# EAGLE board NIRGM V7 Double (EAGLE 8.5.1)
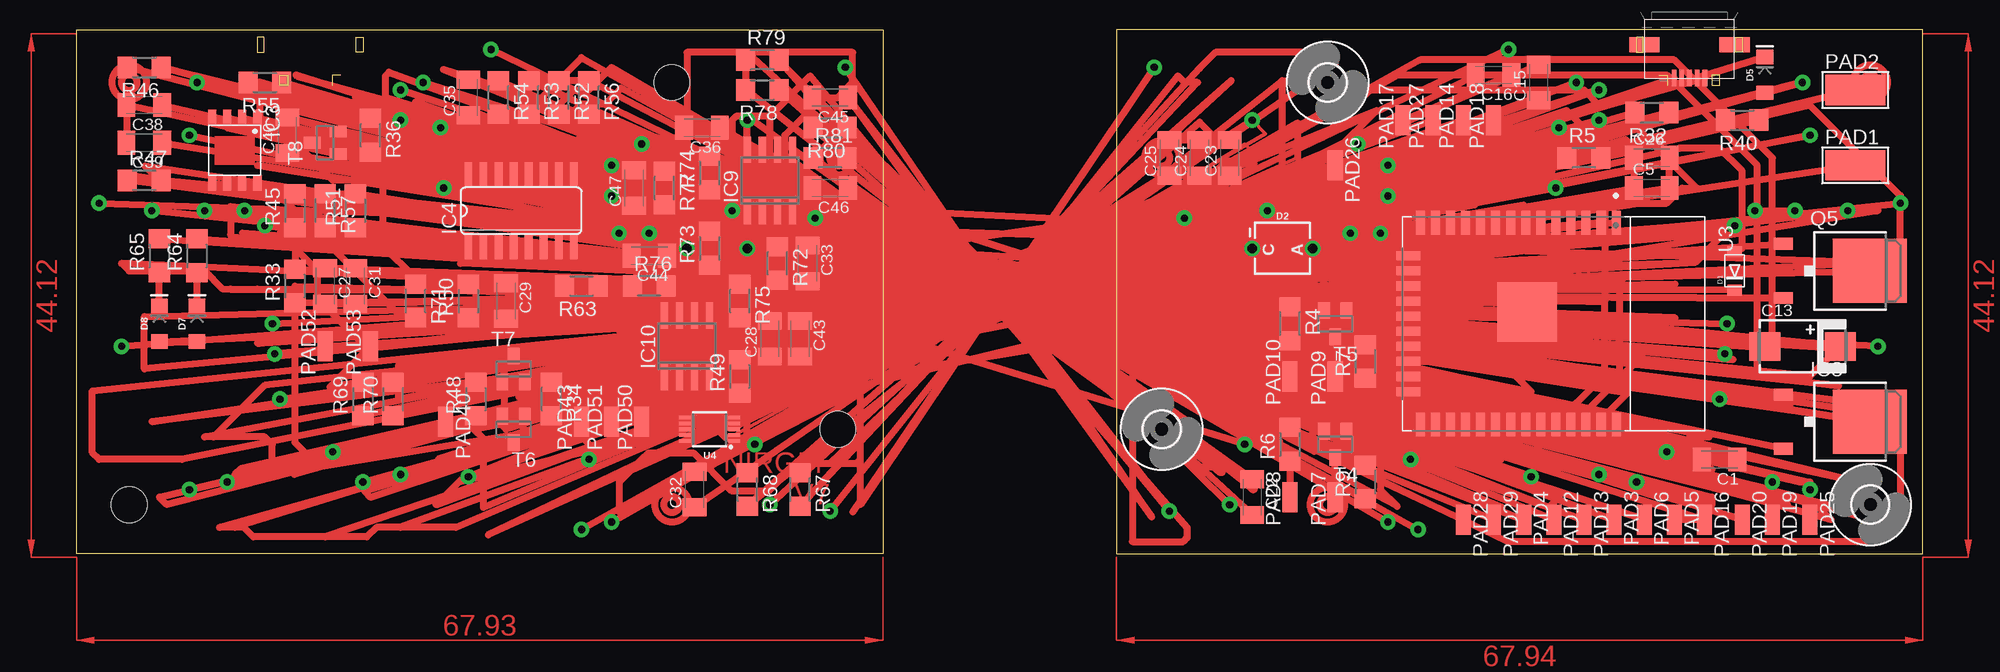
[diagram p0: board, top side]
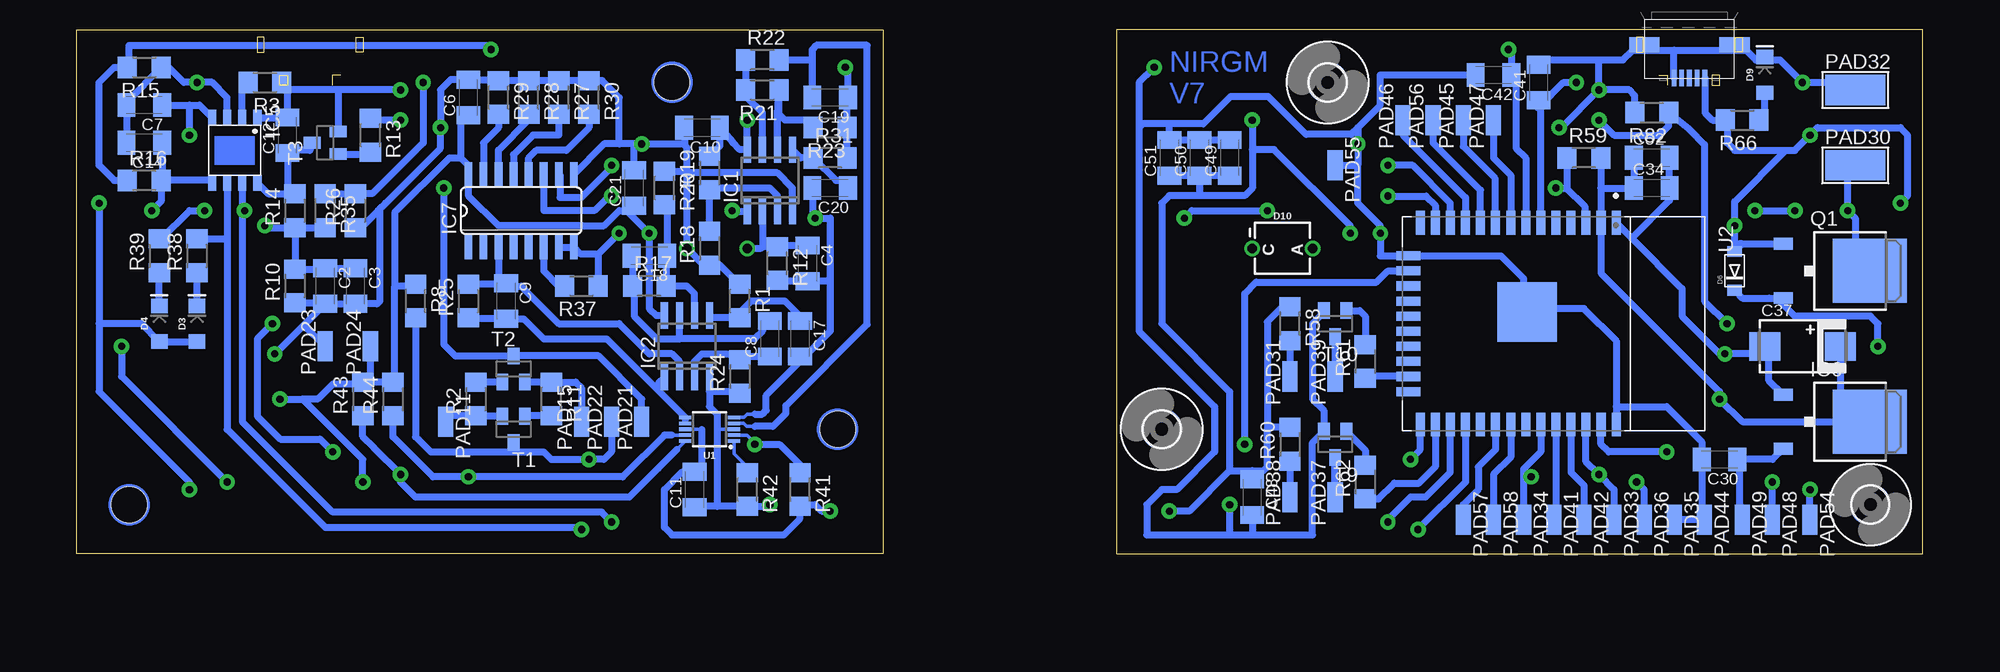
[diagram p1: board, bottom side, seen from below]

Size 155.56 x 44.12 mm. Coordinates in mm from the lower left corner, seen from the top.
Outline: 87.62,44.12 87.62,0 155.56,0 155.56,44.12 87.62,44.12
Outline: 67.93,44.12 67.93,0 0,0 0,44.12 67.93,44.12
Copper layers (1*16): Top 0.035mm / dielectric 1.5mm / Bottom 0.035mm
Design rules "default": minimum track width 6mil, minimum drill 0.35mm, track to track 6mil, track to pad 6mil, pad to pad 6mil, via to via 6mil, smd to smd 6mil, copper to edge 40mil, drill to drill 6mil, minimum pad ring 10mil, minimum via ring 8mil, stop-mask expansion 4mil, vias tented up to drill 0mil, thermal gap 10mil

## Footprints (pad centres in the part's own frame; a part is rotated, then mirrored left to right if it is on the bottom)
C1206K = smd 1.5 x 2: 1 -1.5,0; 2 1.5,0
7343/T = smd 2.6 x 2.4: + 3.175,0; - -3.175,0
SOD-123FL = smd 0.91 x 1.22: A 1.637,0; C -1.637,0
BPW34 = drill 0.8: P$1 0,2.55; P$2 0,-2.55
LED-1206 = smd 1.2 x 1.4: A -1.5,0; C 1.5,0
3,0 = hole 3: 0,0
SO08 = smd 0.6 x 2.2: 1 -1.905,-2.6; 2 -0.635,-2.6; 3 0.635,-2.6; 4 1.905,-2.6; 5 1.905,2.6; 6 0.635,2.6; 7 -0.635,2.6; 8 -1.905,2.6
SOP-8 = smd 1.3 x 0.7: 1 -2.75,1.905; 2 -2.75,0.635; 3 -2.75,-0.635; 4 -2.75,-1.905; 5 2.75,-1.905; 6 2.75,-0.635; 7 2.75,0.635; 8 2.75,1.905
SO16 = smd 0.66 x 2.032: 1 -4.445,-3.073; 2 -3.175,-3.073; 3 -1.905,-3.073; 4 -0.635,-3.073; 5 0.635,-3.073; 6 1.905,-3.073; 7 3.175,-3.073; 8 4.445,-3.073; 9 4.445,3.073; 10 3.175,3.073; 11 1.905,3.073; 12 0.635,3.073; 13 -0.635,3.073; 14 -1.905,3.073; 15 -3.175,3.073; 16 -4.445,3.073
TO252 = smd 1 x 1.6: 1 -2.28,-6.07; 2 2.28,-6.07 | smd 5.4 x 6.2: 3 0,1.23
5-2,5 = smd 2.54 x 5.08: 1 0,0
SMD1,27-2,54 = smd 1.27 x 2.54: 1 0,0
TO252' = smd 1 x 1.6: 1 -2.28,-4.8; 2 2.28,-4.8 | smd 5.4 x 6.2: 3 0,2.5
R1206 = smd 1.6 x 1.803: 1 -1.422,0; 2 1.422,0
SOT23 = smd 1 x 1.4: 1 -0.95,-1.1; 2 0.95,-1.1; 3 0,1.1
MSOP10 = smd 0.3 x 1: 1 -1,-2.05; 2 -0.5,-2.05; 3 0,-2.05; 4 0.5,-2.05; 5 1,-2.05; 6 1,2.05; 7 0.5,2.05; 8 0,2.05; 9 -0.5,2.05; 10 -1,2.05
MODULE_ESP32-WROOM-32D = smd 2 x 0.762: 1 -8.5,5.26; 2 -8.5,3.99; 3 -8.5,2.72; 4 -8.5,1.45; 5 -8.5,0.18; 6 -8.5,-1.09; 7 -8.5,-2.36; 8 -8.5,-3.63; 9 -8.5,-4.9; 10 -8.5,-6.17; 11 -8.5,-7.44; 12 -8.5,-8.71; 13 -8.5,-9.98; 14 -8.5,-11.25; 25 8.5,-11.25; 26 8.5,-9.98; 27 8.5,-8.71; 28 8.5,-7.44; 29 8.5,-6.17; 30 8.5,-4.9; 31 8.5,-3.63; 32 8.5,-2.36; 33 8.5,-1.09; 34 8.5,0.18; 35 8.5,1.45; 36 8.5,2.72; 37 8.5,3.99; 38 8.5,5.26 | smd 0.762 x 2: 15 -5.715,-12.25; 16 -4.445,-12.25; 17 -3.175,-12.25; 18 -1.905,-12.25; 19 -0.635,-12.25; 20 0.635,-12.25; 21 1.905,-12.25; 22 3.175,-12.25; 23 4.445,-12.25; 24 5.715,-12.25 | smd 5 x 5: 39 -1,-2.24
47589-0001 = smd 1.35 x 0.4: 1 2.8,1.3; 2 2.8,0.65; 3 2.8,0; 4 2.8,-0.65; 5 2.8,-1.3 | smd 1.27 x 2.54: P$1 0,3.81; P$2 0,-3.81

## Placement (x,y rotation side)
C1  10uf  [C1206K]  138.42,7.93 180 top
C2  100nf  [C1206K]  134.61,22.53 270 bottom
C3  10uf  [C1206K]  132.07,22.53 270 bottom
C4  5.7pf  [C1206K]  93.97,24.44 270 bottom
C5  100nf  [C1206K]  132.71,30.79 0 top
C6  100nf  [C1206K]  122.55,38.41 90 bottom
C7  10uf  [C1206K]  149.85,37.77 180 bottom
C8  10uf  [C1206K]  97.14,18.09 90 bottom
C9  100nf  [C1206K]  119.37,21.26 270 bottom
C10  100nf  [C1206K]  102.86,35.87 180 bottom
C11  1uf  [C1206K]  103.49,5.38 90 bottom
C12  10uf  [C1206K]  137.78,35.23 90 bottom
C13  220uf  [7343/T]  145.41,17.45 0 top
C14  10uf  [C1206K]  149.85,34.59 180 bottom
C15  100nf  [C1206K]  123.18,39.68 90 top
C16  100nf  [C1206K]  119.37,40.31 180 top
C17  10uf  [C1206K]  94.6,18.09 270 bottom
C18  100nf  [C1206K]  107.3,25.07 180 bottom
C19  100nF  [C1206K]  92.06,38.41 180 bottom
C20  1uF  [C1206K]  92.06,30.79 180 bottom
C21  100nf  [C1206K]  108.57,30.79 90 bottom
C22  100nf  [C1206K]  99.05,4.75 270 top
C23  100nf  [C1206K]  97.14,33.33 90 top
C24  10uf  [C1206K]  94.6,33.33 90 top
C25  10uf  [C1206K]  92.06,33.33 90 top
C26  100nf  [C1206K]  132.71,33.33 0 top
C27  100nf  [C1206K]  20.94,22.53 270 top
C28  10uf  [C1206K]  58.41,18.09 90 top
C29  100nf  [C1206K]  36.19,21.26 270 top
C30  10uf  [C1206K]  17.13,7.93 180 bottom
C31  10uf  [C1206K]  23.48,22.53 270 top
C32  1uf  [C1206K]  52.06,5.38 90 top
C33  5.7pf  [C1206K]  61.59,24.44 270 top
C34  100nf  [C1206K]  22.85,30.79 0 bottom
C35  100nf  [C1206K]  33.01,38.41 90 top
C36  100nf  [C1206K]  52.7,35.87 180 top
C37  220uf  [7343/T]  10.15,17.45 0 bottom
C38  10uf  [C1206K]  5.71,37.77 180 top
C39  10uf  [C1206K]  5.71,34.59 180 top
C40  10uf  [C1206K]  17.77,35.23 90 top
C41  100nf  [C1206K]  32.38,39.68 90 bottom
C42  100nf  [C1206K]  36.19,40.31 180 bottom
C43  10uf  [C1206K]  60.95,18.09 270 top
C44  100nf  [C1206K]  48.25,25.07 180 top
C45  100nF  [C1206K]  63.49,38.41 180 top
C46  1uF  [C1206K]  63.49,30.79 180 top
C47  100nf  [C1206K]  46.98,30.79 90 top
C48  100nf  [C1206K]  56.51,4.75 270 bottom
C49  100nf  [C1206K]  58.41,33.33 90 bottom
C50  10uf  [C1206K]  60.95,33.33 90 bottom
C51  10uf  [C1206K]  63.49,33.33 90 bottom
C52  100nf  [C1206K]  22.85,33.33 0 bottom
D1  SOD4007  [SOD-123FL]  139.69,23.8 90 top
D2  BPW34  [BPW34]  101.59,25.71 270 top
D3  GREEN  [LED-1206]  145.41,19.36 90 bottom
D4  RED  [LED-1206]  148.58,19.36 90 bottom
D5  RED  [LED-1206]  142.23,40.31 90 top
D6  SOD4007  [SOD-123FL]  15.87,23.8 90 bottom
D7  GREEN  [LED-1206]  10.15,19.36 90 top
D8  RED  [LED-1206]  6.98,19.36 90 top
D9  RED  [LED-1206]  13.33,40.31 90 bottom
D10  BPW34  [BPW34]  53.97,25.71 270 bottom
H1  MOUNT-HOLE3.0  [3,0]  151.12,4.12 270 top
H2  MOUNT-HOLE3.0  [3,0]  105.4,39.68 270 top
H3  MOUNT-HOLE3.0  [3,0]  91.43,10.46 270 top
H4  MOUNT-HOLE3.0  [3,0]  4.44,4.12 270 bottom
H5  MOUNT-HOLE3.0  [3,0]  64.12,10.46 270 bottom
H6  MOUNT-HOLE3.0  [3,0]  50.16,39.68 270 bottom
IC1  MCP602SN  [SO08]  97.14,31.42 0 bottom
IC2  MCP602SN  [SO08]  104.13,17.45 0 bottom
IC3  TP4056  [SOP-8]  13.33,33.96 270 top
IC4  4051D  [SO16]  37.46,28.88 0 top
IC5  TP4056  [SOP-8]  142.23,33.96 270 bottom
IC6  3.3v  [TO252]  5.71,11.1 270 bottom
IC7  4051D  [SO16]  118.1,28.88 0 bottom
IC8  3.3v  [TO252]  149.85,11.1 270 top
IC9  MCP602SN  [SO08]  58.41,31.42 0 top
IC10  MCP602SN  [SO08]  51.43,17.45 0 top
PAD1  [5-2,5]  149.85,32.69 270 top
PAD2  [5-2,5]  149.85,39.04 270 top
PAD3  [SMD1,27-2,54]  129.53,2.84 180 top
PAD4  [SMD1,27-2,54]  121.91,2.84 180 top
PAD5  [SMD1,27-2,54]  134.61,2.84 180 top
PAD6  [SMD1,27-2,54]  132.07,2.84 180 top
PAD7  [SMD1,27-2,54]  106.03,4.75 0 top
PAD8  [SMD1,27-2,54]  102.22,4.75 0 top
PAD9  [SMD1,27-2,54]  106.03,14.91 0 top
PAD10  [SMD1,27-2,54]  102.22,14.91 0 top
PAD11  [SMD1,27-2,54]  124.45,11.1 180 bottom
PAD12  [SMD1,27-2,54]  124.45,2.84 180 top
PAD13  [SMD1,27-2,54]  126.99,2.84 180 top
PAD14  [SMD1,27-2,54]  116.83,36.5 0 top
PAD15  [SMD1,27-2,54]  113.02,11.1 0 bottom
PAD16  [SMD1,27-2,54]  137.15,2.84 180 top
PAD17  [SMD1,27-2,54]  111.75,36.5 0 top
PAD18  [SMD1,27-2,54]  119.37,36.5 0 top
PAD19  [SMD1,27-2,54]  142.87,2.84 180 top
PAD20  [SMD1,27-2,54]  140.33,2.84 180 top
PAD21  [SMD1,27-2,54]  107.94,11.1 0 bottom
PAD22  [SMD1,27-2,54]  110.48,11.1 0 bottom
PAD23  [SMD1,27-2,54]  134.61,17.45 0 bottom
PAD24  [SMD1,27-2,54]  130.8,17.45 0 bottom
PAD25  [SMD1,27-2,54]  146.04,2.84 180 top
PAD26  [SMD1,27-2,54]  106.03,32.69 180 top
PAD27  [SMD1,27-2,54]  114.29,36.5 0 top
PAD28  [SMD1,27-2,54]  116.83,2.84 180 top
PAD29  [SMD1,27-2,54]  119.37,2.84 180 top
PAD30  [5-2,5]  5.71,32.69 270 bottom
PAD31  [SMD1,27-2,54]  53.33,14.91 0 bottom
PAD32  [5-2,5]  5.71,39.04 270 bottom
PAD33  [SMD1,27-2,54]  26.02,2.84 180 bottom
PAD34  [SMD1,27-2,54]  33.65,2.84 180 bottom
PAD35  [SMD1,27-2,54]  20.94,2.84 180 bottom
PAD36  [SMD1,27-2,54]  23.48,2.84 180 bottom
PAD37  [SMD1,27-2,54]  49.52,4.75 0 bottom
PAD38  [SMD1,27-2,54]  53.33,4.75 0 bottom
PAD39  [SMD1,27-2,54]  49.52,14.91 0 bottom
PAD40  [SMD1,27-2,54]  31.1,11.1 180 top
PAD41  [SMD1,27-2,54]  31.1,2.84 180 bottom
PAD42  [SMD1,27-2,54]  28.56,2.84 180 bottom
PAD43  [SMD1,27-2,54]  42.54,11.1 0 top
PAD44  [SMD1,27-2,54]  18.4,2.84 180 bottom
PAD45  [SMD1,27-2,54]  38.73,36.5 0 bottom
PAD46  [SMD1,27-2,54]  43.8,36.5 0 bottom
PAD47  [SMD1,27-2,54]  36.19,36.5 0 bottom
PAD48  [SMD1,27-2,54]  12.69,2.84 180 bottom
PAD49  [SMD1,27-2,54]  15.23,2.84 180 bottom
PAD50  [SMD1,27-2,54]  47.62,11.1 0 top
PAD51  [SMD1,27-2,54]  45.08,11.1 0 top
PAD52  [SMD1,27-2,54]  20.94,17.45 0 top
PAD53  [SMD1,27-2,54]  24.75,17.45 0 top
PAD54  [SMD1,27-2,54]  9.52,2.84 180 bottom
PAD55  [SMD1,27-2,54]  49.52,32.69 180 bottom
PAD56  [SMD1,27-2,54]  41.27,36.5 0 bottom
PAD57  [SMD1,27-2,54]  38.73,2.84 180 bottom
PAD58  [SMD1,27-2,54]  36.19,2.84 180 bottom
Q1  ME12P04  [TO252']  6.98,23.8 270 bottom
Q5  ME12P04  [TO252']  148.58,23.8 270 top
R1  100k  [R1206]  99.68,21.26 270 bottom
R2  10k  [R1206]  121.91,13.01 90 bottom
R3  2.2k  [R1206]  139.69,39.68 180 bottom
R4  20R  [R1206]  102.22,19.36 270 top
R5  4.7k  [R1206]  126.99,33.33 0 top
R6  20R  [R1206]  102.22,9.2 90 top
R7  1k  [R1206]  108.57,16.18 90 top
R8  10k  [R1206]  126.99,21.26 270 bottom
R9  1k  [R1206]  108.57,6.02 90 top
R10  10k  [R1206]  137.15,22.53 90 bottom
R11  10k  [R1206]  115.56,13.01 270 bottom
R12  1M  [R1206]  96.51,24.44 270 bottom
R13  1k  [R1206]  130.8,35.23 270 bottom
R14  10k  [R1206]  137.15,28.88 90 bottom
R15  47k  [R1206]  149.85,40.95 180 bottom
R16  47k  [R1206]  149.85,31.42 0 bottom
R17  100k  [R1206]  107.3,22.53 0 bottom
R18  100k  [R1206]  102.22,25.71 90 bottom
R19  100k  [R1206]  102.22,32.05 90 bottom
R20  10k  [R1206]  106.03,30.79 270 bottom
R21  57k  [R1206]  97.78,39.04 180 bottom
R22  200k  [R1206]  97.78,41.58 0 bottom
R23  1k  [R1206]  92.06,35.87 180 bottom
R24  10k  [R1206]  99.68,14.91 90 bottom
R25  220k  [R1206]  122.55,21.26 90 bottom
R26  47k  [R1206]  132.07,28.88 90 bottom
R27  1k  [R1206]  114.92,38.41 270 bottom
R28  4.7k  [R1206]  117.46,38.41 270 bottom
R29  10k  [R1206]  120,38.41 270 bottom
R30  47k  [R1206]  112.38,38.41 270 bottom
R31  2.2M  [R1206]  92.06,33.33 0 bottom
R32  4.7k  [R1206]  132.71,37.14 180 top
R33  10k  [R1206]  18.4,22.53 90 top
R34  10k  [R1206]  40,13.01 270 top
R35  47k  [R1206]  134.61,28.88 270 bottom
R36  1k  [R1206]  24.75,35.23 270 top
R37  10k  [R1206]  113.02,22.53 180 bottom
R38  1k  [R1206]  145.41,25.07 90 bottom
R39  1k  [R1206]  148.58,25.07 90 bottom
R40  1k  [R1206]  140.33,36.5 180 top
R41  10k  [R1206]  94.6,5.38 270 bottom
R42  10k  [R1206]  99.05,5.38 270 bottom
R43  10k  [R1206]  131.44,13.01 90 bottom
R44  10k  [R1206]  128.9,13.01 90 bottom
R45  10k  [R1206]  18.4,28.88 90 top
R46  47k  [R1206]  5.71,40.95 180 top
R47  47k  [R1206]  5.71,31.42 0 top
R48  10k  [R1206]  33.65,13.01 90 top
R49  10k  [R1206]  55.87,14.91 90 top
R50  220k  [R1206]  33.01,21.26 90 top
R51  47k  [R1206]  23.48,28.88 90 top
R52  1k  [R1206]  40.63,38.41 270 top
R53  4.7k  [R1206]  38.09,38.41 270 top
R54  10k  [R1206]  35.55,38.41 270 top
R55  2.2k  [R1206]  15.87,39.68 180 top
R56  47k  [R1206]  43.17,38.41 270 top
R57  47k  [R1206]  20.94,28.88 270 top
R58  20R  [R1206]  53.33,19.36 270 bottom
R59  4.7k  [R1206]  28.56,33.33 0 bottom
R60  20R  [R1206]  53.33,9.2 90 bottom
R61  1k  [R1206]  46.98,16.18 90 bottom
R62  1k  [R1206]  46.98,6.02 90 bottom
R63  10k  [R1206]  42.54,22.53 180 top
R64  1k  [R1206]  10.15,25.07 90 top
R65  1k  [R1206]  6.98,25.07 90 top
R66  1k  [R1206]  15.23,36.5 180 bottom
R67  10k  [R1206]  60.95,5.38 270 top
R68  10k  [R1206]  56.51,5.38 270 top
R69  10k  [R1206]  24.12,13.01 90 top
R70  10k  [R1206]  26.66,13.01 90 top
R71  10k  [R1206]  28.56,21.26 270 top
R72  1M  [R1206]  59.05,24.44 270 top
R73  100k  [R1206]  53.33,25.71 90 top
R74  100k  [R1206]  53.33,32.05 90 top
R75  100k  [R1206]  55.87,21.26 270 top
R76  100k  [R1206]  48.25,22.53 0 top
R77  10k  [R1206]  49.52,30.79 270 top
R78  57k  [R1206]  57.77,39.04 180 top
R79  200k  [R1206]  57.77,41.58 0 top
R80  1k  [R1206]  63.49,35.87 180 top
R81  2.2M  [R1206]  63.49,33.33 0 top
R82  4.7k  [R1206]  22.85,37.14 180 bottom
T1  BC850  [SOT23]  118.73,10.46 180 bottom
T2  BC850  [SOT23]  118.73,15.54 0 bottom
T3  BC850  [SOT23]  134.61,34.59 90 bottom
T4  BC850  [SOT23]  106.03,9.2 180 top
T5  BC850  [SOT23]  106.03,19.36 180 top
T6  BC850  [SOT23]  36.82,10.46 180 top
T7  BC850  [SOT23]  36.82,15.54 0 top
T8  BC850  [SOT23]  20.94,34.59 90 top
T9  BC850  [SOT23]  49.52,9.2 180 bottom
T10  BC850  [SOT23]  49.52,19.36 180 bottom
U1  ADS1015  [MSOP10]  102.22,10.46 90 bottom
U2  ESP32-WROOM-32D  [MODULE_ESP32-WROOM-32D]  31.1,19.36 270 bottom
U3  ESP32-WROOM-32D  [MODULE_ESP32-WROOM-32D]  124.45,19.36 270 top
U4  ADS1015  [MSOP10]  53.33,10.46 90 top
U$1  MICRO-USB  [47589-0001]  135.88,42.85 270 top
U$2  MICRO-USB  [47589-0001]  19.67,42.85 270 bottom

## Library data of the parts
C1-C12 C14-C36 C38-C52 = rcl; SPICEPREFIX: C
C13 C37 = cap-master
D1 D6 = adafruit
D2 D10 = SparkFun-Sensors; SF_ID: PRT-09541
D3-D5 D7-D9 = SparkFun-LED; PROD_ID: DIO-00862
H1-H6 = holes
IC1 IC2 IC9 IC10 = linear
IC3 IC5 = TP4056
IC4 IC7 = 40xx
IC6 IC8 = v-reg-2
PAD1-PAD58 = wirepad
Q1 Q5 = transistor-fet
R1-R82 = rcl; SPICEPREFIX: R
T1-T10 = transistor
U1 U4 = SparkFun-IC-Conversion; PROD_ID: IC-12270
U2 U3 = ESP32-WROOM-32DMODED; AVAILABILITY: Unavailable; DESCRIPTION: IC: SoC; GPIO, I2C, I2S, IR, SD, SDIO, SPI, UART; 2.7÷3.6VDC; 20dBm; MF: Espressif Systems; MP: ESP32-WROOM-32D; PACKAGE: Module Espressif Systems; PRICE: None
U$1 U$2 = con-molex-usb

## Nets
3.3V: C5.1 C6.1 C10.1 C11.2 C13.+ C21.1 C22.1 C23.1 C24.1 C25.1 C26.1 IC1.8 IC2.8 IC7.16 IC8.3 PAD6.1 PAD24.1 R4.1 R5.2 R6.2 R8.1 R19.2 R41.2 R43.2 R44.2 U1.8 U3.2
3.3V1: C32.2 C34.1 C35.1 C36.1 C37.+ C47.1 C48.1 C49.1 C50.1 C51.1 C52.1 IC4.16 IC6.3 IC9.8 IC10.8 PAD36.1 PAD53.1 R58.1 R59.2 R60.2 R67.2 R69.2 R70.2 R71.1 R74.2 U2.2 U4.8
ADS_COMP: R41.1 U1.2 U3.16
ADS_COMP1: R67.1 U2.16 U4.2
CH_RX: PAD12.1 U3.34
CH_RX1: PAD41.1 U2.34
CH_TX: PAD13.1 U3.35
CH_TX1: PAD42.1 U2.35
CHARGE_DISABLE: R13.1 R32.1 U3.37
CHARGE_DISABLE1: R36.1 R82.1 U2.37
CHARGE_E: C12.1 IC5.8 R14.2 T3.3
CHARGE_E1: C40.1 IC3.8 R45.2 T8.3
CHARGED_LOW: IC5.6 R38.2 U3.28
CHARGED_LOW1: IC3.6 R64.2 U2.28
CHARGING_LOW: IC5.7 R39.2 U3.27
CHARGING_LOW1: IC3.7 R65.2 U2.27
CHP_EN: PAD21.1 R5.1 T2.3 U3.3
CHP_EN1: PAD50.1 R59.1 T7.3 U2.3
DTR: PAD11.1 R2.1 T1.2
DTR1: PAD40.1 R48.1 T6.2
EN_IR1: R9.1 U3.26
EN_IR2: R7.1 U3.23
EN_IR3: R62.1 U2.26
EN_IR4: R61.1 U2.23
GND: C1.2 C2.2 C3.2 C5.2 C6.2 C7.2 C10.2 C11.1 C12.2 C13.- C14.2 C15.2 C16.2 C19.1 C21.2 C22.2 C23.2 C24.2 C25.2 C26.2 D2.P$1 D5.C IC1.4 IC2.4 IC5.1 IC5.3 IC7.7 IC7.8 IC7.9 IC8.1 PAD2.1 PAD5.1 PAD16.1 PAD23.1 PAD26.1 R1.1 R3.1 R10.1 R15.1 R18.1 R20.1 R23.1 R24.1 R26.1 R27.1 R28.1 R29.1 R30.1 R31.2 R32.2 R37.1 R42.2 T3.2 T4.2 T5.2 U1.3 U3.1 U3.15 U3.38 U3.39 U$1.5
GND1: C27.2 C30.2 C31.2 C32.1 C34.2 C35.2 C36.2 C37.- C38.2 C39.2 C40.2 C41.2 C42.2 C45.1 C47.2 C48.2 C49.2 C50.2 C51.2 C52.2 D9.C D10.P$1 IC3.1 IC3.3 IC4.7 IC4.8 IC4.9 IC6.1 IC9.4 IC10.4 PAD32.1 PAD35.1 PAD44.1 PAD52.1 PAD55.1 R33.1 R46.1 R49.1 R51.1 R52.1 R53.1 R54.1 R55.1 R56.1 R63.1 R68.2 R73.1 R75.1 R77.1 R80.1 R81.2 R82.2 T8.2 T9.2 T10.2 U2.1 U2.15 U2.38 U2.39 U4.3 U$2.5
IO0: PAD22.1 R8.2 T1.3 U3.25
IO1: PAD47.1 U2.8
IO2: PAD45.1 U2.9
IO3: PAD51.1 R71.2 T6.3 U2.25
IO4: PAD46.1 U2.11
IO5: PAD58.1 U2.31
IO6: PAD57.1 U2.30
IO7: PAD56.1 U2.10
IO18: PAD28.1 U3.30
IO19: PAD29.1 U3.31
IO25: PAD27.1 U3.10
IO26: PAD17.1 U3.11
IO32: PAD18.1 U3.8
IO33: PAD14.1 U3.9
IR1_LED_ANODE: PAD8.1 R6.1
IR1_LED_ANODE1: PAD38.1 R60.1
IR1_LED_CATHODE: PAD7.1 T4.3
IR1_LED_CATHODE1: PAD37.1 T9.3
IR2_LED_ANODE: PAD10.1 R4.2
IR2_LED_ANODE1: PAD31.1 R58.2
IR2_LED_CATHODE: PAD9.1 T5.3
IR2_LED_CATHODE1: PAD39.1 T10.3
N$1: D5.A R40.1
N$2: D4.C R39.1
N$3: R7.2 T5.1
N$4: D3.C R38.1
N$5: R11.2 T1.1
N$6: C17.1 IC2.5 R1.2
N$7: C4.1 D2.P$2 IC1.2 R12.1
N$8: R9.2 T4.1
N$9: R42.1 U1.1
N$10: IC1.3 R18.2 R19.1
N$11: IC7.6 R37.2
N$12: C8.2 C18.2 IC2.7 R17.1
N$13: R13.2 T3.1
N$14: C18.1 IC2.6 R17.2 R20.2
N$15: IC1.6 R21.1 R23.2
N$16: C20.1 IC1.5 R31.1
N$17: IC1.7 R21.2 R22.1
N$18: R2.2 T2.1
N$19: R36.2 T8.1
N$20: R34.2 T6.1
N$21: R48.2 T7.1
N$22: U3.29
N$23: U3.14
N$24: C28.1 IC10.3 R49.2
N$25: C29.1 IC4.3 IC10.2 R50.2
N$26: IC4.13 R52.2
N$27: IC4.14 R53.2
N$28: IC4.15 R54.2
N$29: C8.1 IC2.3 R24.2
N$30: IC4.12 R56.2
N$31: IC4.6 R63.2
N$32: D9.A R66.1
N$33: R68.1 U4.1
N$34: R62.2 T9.1
N$35: R61.2 T10.1
N$36: C33.1 D10.P$2 IC9.2 R72.1
N$37: IC9.3 R73.2 R74.1
N$38: D8.C R65.1
N$39: C9.1 IC2.2 IC7.3 R25.2
N$40: IC7.13 R27.2
N$41: IC7.14 R28.2
N$42: IC7.15 R29.2
N$43: IC7.12 R30.2
N$44: D7.C R64.1
N$45: C43.1 IC10.5 R75.2
N$46: C28.2 C44.2 IC10.7 R76.1
N$47: C44.1 IC10.6 R76.2 R77.2
N$48: IC9.6 R78.1 R80.2
N$49: C46.1 IC9.5 R81.1
N$50: IC9.7 R78.2 R79.1
N$51: U2.29
N$52: U2.14
PHOTODIODE_ADC: C4.2 C17.2 C20.2 IC1.1 R12.2 U1.5
PHOTODIODE_ADC1: C33.2 C43.2 C46.2 IC9.1 R72.2 U4.5
PPG_SIGNAL_1_ADC: C9.2 IC2.1 R25.1 U1.6 U1.7
PPG_SIGNAL_1_ADC1: C29.2 IC10.1 R50.1 U4.6 U4.7
PPG_SIGNAL_2_ADC: C19.2 R22.2 U1.4
PPG_SIGNAL_2_ADC1: C45.2 R79.2 U4.4
PPG_SIGNAL_GAIN_A: IC7.11 U3.13
PPG_SIGNAL_GAIN_A1: IC4.11 U2.13
PPG_SIGNAL_GAIN_B: IC7.10 U3.12
PPG_SIGNAL_GAIN_B1: IC4.10 U2.12
R_PROG: IC5.2 R3.2
R_PROG1: IC3.2 R55.2
RTS: PAD15.1 R11.1 T2.2
RTS1: PAD43.1 R34.1 T7.2
SCL: PAD3.1 R43.1 U1.10 U3.36
SCL1: PAD33.1 R69.1 U2.36 U4.10
SDA: PAD4.1 R44.1 U1.9 U3.33
SDA1: PAD34.1 R70.1 U2.33 U4.9
V_BATT: C14.1 IC5.5 PAD1.1 Q5.3 R16.2
V_BATT1: C39.1 IC3.5 PAD30.1 Q1.3 R47.2
V_BATT_ADC: C16.1 R15.2 R16.1 U3.7
V_BATT_ADC1: C42.1 R46.2 R47.1 U2.7
V_USB: C2.1 C3.1 C7.1 D1.A D3.A D4.A IC5.4 PAD25.1 Q5.1 R10.2 R14.1 R35.2 R40.2 U$1.1
V_USB1: C27.1 C31.1 C38.1 D6.A D7.A D8.A IC3.4 PAD54.1 Q1.1 R33.2 R45.1 R57.2 R66.2 U$2.1
V_USB_ADC: C15.1 R26.2 R35.1 U3.6
V_USB_ADC1: C41.1 R51.2 R57.1 U2.6
VIN: C1.1 IC8.2 PAD20.1
VIN1: C30.1 IC6.2 PAD49.1
VIN_SW: D1.C PAD19.1 Q5.2
VIN_SW1: D6.C PAD48.1 Q1.2

## Tracks (layer width: path | path; a pad name or v marks a point on that pad's centre or on a via)
3.3V  (via drill 0.6 pad 1.3)
  Top 0.61: IC8.3 15.23,32.69 v138.42,13.01 17.13,30.15 27.11,20.17 U3.2 27.14,15.91 27.14,13.01 | IC8.3 4.84,31.79 | R5.2 27.14,13.01 | R4.1 53.65,22.7 55.23,24.28 55.23,33.33 | 27.14,13.01 C5.1 C26.1 | C13.+ 6.98,31.42 5.75,32.65 IC8.3 | 54.12,33.17 R6.2 55.08,33.17 55.23,33.33 | v107.3,26.98 48.25,16.18 54.67,9.76 56.51,9.76 | 55.23,33.33 55.23,36.5 55.55,36.82 56.51,36.82 | 58.41,36.82 56.51,36.82 | 58.41,36.82 58.41,30.15 64.12,24.44 64.12,14.28 63.49,13.64 60.95,13.64 | 58.41,36.82 61.81,40.22 v92.06,3.57 | C22.1 56.51,36.82 | v99.05,36.5 56.51,9.76 | 56.51,9.76 56.51,13.01 57.14,13.64 60.95,13.64 | C23.1 C24.1 | C24.1 C25.1 | C24.1 60.95,13.64 | PAD6.1 23.48,38.41 v131.44,6.02
  Bottom 0.305: 102.86,10.46 U1.8
  Bottom 0.61: v138.42,13.01 136.52,13.01 | v131.44,6.02 131.44,7.93 136.52,13.01 | 130.8,14.43 R44.2 128.74,14.58 128.74,22.53 | 130.8,14.43 R43.2 131.59,14.28 133.98,14.28 135.25,13.01 136.52,13.01 | 102.86,10.46 102.86,7.52 C11.2 104.53,6.88 106.03,5.38 106.03,2.21 105.4,1.57 95.97,1.57 94.6,2.94 R41.2 94.45,4.12 93.33,4.12 92.79,3.57 v92.06,3.57 | 123.18,33.33 124.14,33.33 128.74,28.73 128.74,22.53 | C6.1 123.18,36.27 123.18,33.33 | R8.1 127.14,22.53 128.74,22.53 | PAD24.1 130.8,14.43 | 123.18,33.33 122.55,32.69 IC7.16 122.55,30.15 120.03,27.64 112.99,27.64 112.96,27.61 111.11,27.61 109.84,28.88 109.21,28.88 | R19.2 101.36,34.34 C10.1 100.26,34.59 99.68,34.02 IC1.8 v99.05,36.5 | IC2.8 106.73,20.05 107.3,20.62 v107.3,26.98 109.21,28.88 | C21.1 108.8,29.29 109.21,28.88
3.3V1  (via drill 0.6 pad 1.3)
  Top 0.305: 102.86,33.33 U4.8
  Top 0.61: v17.13,13.01 136.52,30.79 | v24.12,6.02 131.44,35.87 136.52,30.79 | 130.8,29.36 R70.2 128.74,29.21 128.74,21.26 | 130.8,29.36 R69.2 131.59,29.52 133.98,29.52 135.25,30.79 136.52,30.79 | 102.86,33.33 102.86,36.27 C32.2 104.53,36.91 106.03,38.41 106.03,41.58 105.4,42.22 95.97,42.22 94.6,40.85 R67.2 94.45,39.68 93.33,39.68 92.79,40.22 v63.49,3.57 | 123.18,10.46 124.14,10.46 128.74,15.06 128.74,21.26 | C35.1 123.18,7.52 123.18,10.46 | R71.1 127.14,21.26 128.74,21.26 | PAD53.1 130.8,29.36 | 123.18,10.46 122.55,11.1 IC4.16 122.55,13.64 120.03,16.16 112.99,16.16 112.96,16.18 111.11,16.18 109.84,14.91 109.21,14.91 | R74.2 101.36,9.45 C36.1 100.26,9.2 99.68,9.77 IC9.8 v56.51,36.5 | IC10.8 106.73,23.74 107.3,23.17 v48.25,26.98 109.21,14.91 | C47.1 108.8,14.51 109.21,14.91
  Bottom 0.61: IC6.3 15.23,11.1 v17.13,13.01 17.13,13.64 27.11,23.62 U2.2 27.14,27.88 27.14,30.79 | IC6.3 4.84,12.01 | R59.2 27.14,30.79 | R58.1 53.65,21.09 55.23,19.51 55.23,10.46 | 27.14,30.79 C34.1 C52.1 | C37.+ 6.98,12.37 5.75,11.14 IC6.3 | 54.12,10.62 R60.2 55.08,10.62 55.23,10.46 | v48.25,26.98 48.25,27.61 54.67,34.03 IC9.8 | 55.23,10.46 55.23,7.29 55.55,6.97 56.51,6.97 | 58.41,6.97 56.51,6.97 | 58.41,6.97 58.41,13.64 64.12,19.36 64.12,29.52 63.49,30.15 60.95,30.15 | 58.41,6.97 61.81,3.57 v63.49,3.57 | C48.1 56.51,6.97 | v56.51,36.5 IC9.8 | IC9.8 56.51,30.79 57.14,30.15 60.95,30.15 | C49.1 C50.1 | C50.1 C51.1 | C50.1 60.95,30.15 | PAD36.1 23.48,5.38 v24.12,6.02
ADS_COMP  (via drill 0.6 pad 1.3)
  Top 0.61: U3.16 45.08,19.99 46.03,20.94 56.19,20.94 57.14,21.9 v98.41,9.2
  Bottom 0.305: U1.2 99.05,9.96 98.41,9.33 v98.41,9.2
  Bottom 0.61: v98.41,9.2 96.34,9.2 94.6,7.46 R41.1
ADS_COMP1  (via drill 0.6 pad 1.3)
  Top 0.305: U4.2 99.05,33.83 98.41,34.46 v57.14,9.2
  Top 0.61: v57.14,9.2 96.34,34.59 94.6,36.33 R67.1
  Bottom 0.61: U2.16 45.08,23.8 46.03,22.85 56.19,22.85 57.14,21.9 v57.14,9.2
CH_RX
  Top 0.61: PAD12.1 30.92,40.77 U3.34
CH_RX1
  Bottom 0.61: PAD41.1 30.92,3.02 U2.34
CH_TX
  Top 0.61: U3.35 29.65,36.95 28.56,38.05 PAD13.1
CH_TX1
  Bottom 0.61: U2.35 29.65,6.83 28.56,5.75 PAD42.1
CHARGE_DISABLE  (via drill 0.6 pad 1.3)
  Top 0.61: v139.06,19.36 18.4,22.53 18.4,9.35 19.67,8.08 R32.1 21.43,7.77 22.21,8.56 26.02,8.56 v128.26,36.5 | U3.37 27.11,34.59 26.48,35.23 v133.98,8.56
  Bottom 0.61: v128.26,36.5 130.8,36.5 R13.1 | v133.98,8.56 135.05,9.64 138.39,9.64 140.33,11.57 140.33,18.09 v139.06,19.36
CHARGE_DISABLE1  (via drill 0.6 pad 1.3)
  Top 0.61: v27.29,36.5 130.8,7.29 R36.1 | v21.58,8.56 135.05,34.15 138.39,34.15 140.33,32.22 140.33,25.71 v16.5,19.36
  Bottom 0.61: v16.5,19.36 18.4,21.26 18.4,34.44 19.67,35.71 R82.1 21.43,36.02 22.21,35.23 26.02,35.23 v27.29,36.5 | U2.37 27.11,9.2 26.48,8.56 v21.58,8.56
CHARGE_E
  Bottom 0.61: IC5.8 139.42,30.3 137.78,30.3 | 137.78,30.3 R14.2 | 137.78,30.3 C12.1 137.56,33.96 135.88,33.96 135.88,34.43 T3.3
CHARGE_E1
  Top 0.61: IC3.8 139.42,13.49 137.78,13.49 | 137.78,13.49 R45.2 | 137.78,13.49 C40.1 137.56,9.83 135.88,9.83 135.88,9.37 T8.3
CHARGED_LOW  (via drill 0.6 pad 1.3)
  Top 0.61: U3.28 38.55,37.77 42.54,41.76 v113.02,2.02
  Bottom 0.61: IC5.6 142.87,26.34 | 142.87,26.34 142.87,10.46 134.61,2.21 113.21,2.21 v113.02,2.02 | R38.2 143.02,26.49 142.87,26.34
CHARGED_LOW1  (via drill 0.6 pad 1.3)
  Top 0.61: IC3.6 142.87,17.45 | 142.87,17.45 142.87,33.33 134.61,41.58 113.21,41.58 v42.54,2.02 | R64.2 143.02,17.3 142.87,17.45
  Bottom 0.61: U2.28 38.55,6.02 v42.54,2.03 v42.54,2.02
CHARGING_LOW  (via drill 0.6 pad 1.3)
  Top 0.61: v141.4,28.88 v144.77,28.88 | U3.27 39.82,36.95 41.9,39.04 43.17,39.04 45.08,40.95 v110.48,2.65
  Bottom 0.61: IC5.7 141.59,28.88 | 141.59,28.88 v141.4,28.88 | v144.77,28.88 146.04,28.88 148.43,26.49 R39.2 | 141.59,28.88 141.59,11.1 133.98,3.48 111.31,3.48 v110.48,2.65
CHARGING_LOW1  (via drill 0.6 pad 1.3)
  Top 0.61: IC3.7 141.59,14.91 | 141.59,14.91 v14.15,28.88 | v10.79,28.88 146.04,14.91 148.43,17.3 R65.2 | 141.59,14.91 141.59,32.69 133.98,40.31 111.31,40.31 v45.08,2.65
  Bottom 0.61: v14.15,28.88 v10.79,28.88 | U2.27 39.82,6.83 41.9,4.75 43.17,4.75 45.08,2.84 v45.08,2.65
CHP_EN  (via drill 0.6 pad 1.3)
  Top 0.61: U3.3 28.46,15.86 28.46,14.6 30.05,13.01 | v124.62,30.79 30.05,13.01 | R5.1 29.99,12.94 30.05,13.01
  Bottom 0.61: v124.62,30.79 124.62,17.62 123.64,16.65 T2.3 111.58,16.65 107.94,13.01 PAD21.1
CHP_EN1  (via drill 0.6 pad 1.3)
  Top 0.61: v30.93,30.79 124.62,26.17 123.64,27.15 T7.3 111.58,27.15 107.94,30.79 PAD50.1
  Bottom 0.61: U2.3 28.46,27.93 28.46,29.19 30.05,30.79 | v30.93,30.79 30.05,30.79 | R59.1 29.99,30.85 30.05,30.79
DTR
  Bottom 0.61: T1.2 121.89,11.56 R2.1 124.3,11.58 PAD11.1
DTR1
  Top 0.61: T6.2 121.89,32.23 R48.1 124.3,32.21 PAD40.1
EN_IR1
  Top 0.61: U3.26 41.09,36.5 42.45,37.86 44.53,37.86 45.86,39.19 R9.1
EN_IR2
  Top 0.61: R7.1 46.83,28.88 U3.23
EN_IR3
  Bottom 0.61: U2.26 41.09,7.29 42.45,5.93 44.53,5.93 45.86,4.6 R62.1
EN_IR4
  Bottom 0.61: R61.1 46.83,14.91 U2.23
GND  (via drill 0.6 pad 1.3)
  Top 0.61: PAD2.1 6.98,4.75 7.61,4.12 v145.41,39.68 12.05,2.21 13.33,2.21 | U3.39 32.34,24.44 | 27.29,2.21 25.27,2.21 24.46,1.4 20.94,1.4 | 20.94,1.4 14.89,1.4 14.08,2.21 13.33,2.21 | v128.26,39.04 27.29,2.21 | U3.39 33.08,23.17 28.56,23.17 25.84,25.89 25.84,31.42 | 25.84,31.42 U3.38 | U3.39 33.38,23.44 33.65,23.17 33.65,20.62 35.55,18.72 U3.15 45.71,18.72 v109.84,26.98 45.71,16.18 47.62,14.28 47.62,11.1 | 25.84,31.42 21.58,31.42 18.63,34.37 C1.2 18.63,40.18 18.49,40.32 PAD16.1 PAD5.1 | T5.2 50.47,23.48 51.43,24.44 51.43,30.79 50.47,31.74 T4.2 51.43,34.45 51.43,42.22 56.51,42.22 | U3.1 24.54,17.24 | 24.54,17.24 20.31,21.47 20.31,23.8 17.13,26.98 v138.86,16.82 13.96,26.98 C13.- 13.04,26.62 12.97,26.86 12.97,29.22 IC8.1 | 47.62,11.1 v107.94,34.49 47.62,7.93 | v128.26,39.04 30.47,7.93 v124.89,35.87 | 47.62,7.93 45.71,6.02 45.71,3.48 C16.2 | C15.2 31.97,2.21 27.29,2.21 | PAD26.1 47.62,11.1 | 47.62,7.93 48.17,8.48 51.97,8.48 55.15,5.3 58.32,5.3 60.63,7.61 63.49,7.61 | 65.39,3.48 v90.8,40.95 66.03,4.12 66.03,7.93 | 58.41,42.22 65.39,42.22 65.39,39.68 64.12,38.41 62.86,38.41 59.68,35.23 59.68,31.42 66.03,25.07 66.03,7.93 | 58.41,42.22 56.51,42.22 | v97.14,4.12 58.41,42.22 | C22.2 56.51,42.22 | U$1.5 20.97,1.43 20.94,1.4 | C23.2 C24.2 C25.2 63.49,7.61 | 66.03,7.93 65.71,7.61 63.49,7.61 | v128.26,39.04 24.75,4.75 24.27,5.23 R32.2 | D5.C 13.33,2.21 | 24.54,17.24 21.35,14.04 C5.2 C26.2
  Bottom 0.305: U1.3 101.59,10.46 | 101.59,10.46 101.59,11.1 | 101.59,10.46 101.59,4.12 101.59,3.96
  Bottom 0.61: R10.1 134.69,21.11 C2.2 | C2.2 C3.2 130.24,21.03 130.01,21.26 130.01,29.03 129.53,29.52 | IC5.3 142.87,38.41 144.14,39.68 v145.41,39.68 146.52,39.68 147.79,40.95 R15.1 151.35,38.02 C7.2 C14.2 | v128.26,39.04 133.34,39.04 | T3.2 133.51,38.87 133.34,39.04 | 130.17,28.88 131.59,27.46 R26.1 131.91,27.29 | IC7.7 IC7.8 | 119.22,39.83 119.37,39.68 | IC7.8 113.66,25.07 | 129.53,29.52 | 129.53,29.52 130.17,28.88 | 130.17,28.88 | C2.2 136.4,19.24 | 136.4,19.24 138.83,16.82 v138.86,16.82 | IC7.9 111.11,34.49 109.84,34.49 | C11.1 104.05,3.96 101.59,3.96 R42.2 97.3,3.96 v97.14,4.12 | 108.57,34.49 v107.94,34.49 104.43,34.49 104.27,34.33 | 108.57,34.49 109.84,34.49 | 101.59,4.12 101.59,11.1 101.59,11.73 102.22,12.37 102.22,13.64 | 119.22,39.83 R29.1 120.08,39.91 C6.2 124.03,39.91 124.89,39.04 v124.89,35.87 124.89,34.15 130.17,28.88 | 119.22,39.83 R28.1 R27.1 R30.1 111.27,39.83 109.84,38.41 109.84,34.49 | IC2.4 102.22,13.64 | 137.78,39.04 C12.2 137.81,36.71 IC5.1 | 137.78,39.04 137.78,39.68 R3.1 | 133.34,39.04 137.78,39.04 | PAD23.1 136.4,19.24 | R31.2 R23.1 90.64,38.33 C19.1 90.56,40.72 v90.8,40.95 | 104.14,31.86 104.14,31.42 104.13,31.43 | C10.2 104.27,35.21 104.27,34.33 | 104.13,31.43 104.13,32.05 | 104.13,32.05 104.13,34.19 104.27,34.33 | 104.13,32.05 96.51,32.05 95.24,30.79 IC1.4 | 111.6,23.32 R37.1 111.6,25.22 | v109.84,26.98 111.6,25.22 | 111.6,25.22 113.07,25.22 IC7.8 | R20.1 104.28,32.21 104.13,32.05 | R1.1 99.91,22.85 101.35,24.28 R18.1 102.72,24.28 D2.P$1 104.13,31.43 | R24.1 100.47,13.64 102.22,13.64 | C21.2 108.57,34.49
GND1  (via drill 0.6 pad 1.3)
  Top 0.305: U4.3 101.59,33.33 | 101.59,33.33 101.59,32.69 | 101.59,33.33 101.59,39.68 101.59,39.83
  Top 0.61: R33.1 134.69,22.68 C27.2 | C27.2 C31.2 130.24,22.76 130.01,22.53 130.01,14.76 129.53,14.28 | IC3.3 142.87,5.38 144.14,4.12 v10.15,39.68 146.52,4.12 147.79,2.84 R46.1 151.35,5.77 C38.2 C39.2 | v27.29,39.04 133.34,4.75 | T8.2 133.51,4.92 133.34,4.75 | 130.17,14.91 131.59,16.33 R51.1 131.91,16.5 | IC4.7 IC4.8 | 119.22,3.96 119.37,4.12 | IC4.8 113.66,18.72 | 129.53,14.28 | 129.53,14.28 130.17,14.91 | 130.17,14.91 | C27.2 136.4,24.55 | 136.4,24.55 138.83,26.98 v16.69,16.82 | IC4.9 111.11,9.3 109.84,9.3 | C32.1 104.05,39.83 101.59,39.83 R68.2 97.3,39.83 v58.41,4.12 | 108.57,9.3 v47.62,34.49 104.43,9.3 104.27,9.46 | 108.57,9.3 109.84,9.3 | 101.59,39.68 101.59,32.69 101.59,32.05 102.22,31.42 102.22,30.15 | 119.22,3.96 R54.1 120.08,3.88 C35.2 124.03,3.88 124.89,4.75 v30.66,35.87 124.89,9.64 130.17,14.91 | 119.22,3.96 R53.1 R52.1 R56.1 111.27,3.96 109.84,5.38 109.84,9.3 | IC10.4 102.22,30.15 | 137.78,4.75 C40.2 137.81,7.08 IC3.1 | 137.78,4.75 137.78,4.12 R55.1 | 133.34,4.75 137.78,4.75 | PAD52.1 136.4,24.55 | R81.2 R80.1 90.64,5.46 C45.1 90.56,3.07 v64.76,40.95 | 104.14,11.93 104.14,12.37 104.13,12.36 | C36.2 104.27,8.58 104.27,9.46 | 104.13,12.36 104.13,11.73 | 104.13,11.73 104.13,9.6 104.27,9.46 | 104.13,11.73 96.51,11.73 95.24,13.01 IC9.4 | 111.6,20.47 R63.1 111.6,18.57 | v45.71,26.98 111.6,18.57 | 111.6,18.57 113.07,18.57 IC4.8 | R77.1 104.28,11.58 104.13,11.73 | R75.1 99.91,20.94 101.35,19.51 R73.1 102.72,19.51 D10.P$1 104.13,18.08 104.13,12.36 | R49.1 100.47,30.15 102.22,30.15 | C47.2 108.57,9.3
  Bottom 0.61: PAD32.1 6.98,39.04 7.61,39.68 v10.15,39.68 12.05,41.58 13.33,41.58 | U2.39 32.34,19.36 | 27.29,41.58 25.27,41.58 24.46,42.39 20.94,42.39 | 20.94,42.39 14.89,42.39 14.08,41.58 13.33,41.58 | v27.29,39.04 27.29,41.58 | U2.39 33.08,20.62 28.56,20.62 25.84,17.91 25.84,12.37 | 25.84,12.37 U2.38 | U2.39 33.38,20.36 33.65,20.62 33.65,23.17 35.55,25.07 U2.15 45.71,25.07 v45.71,26.98 45.71,27.61 47.62,29.52 47.62,32.69 | 25.84,12.37 21.58,12.37 18.63,9.43 C30.2 18.63,3.61 18.49,3.47 PAD44.1 PAD35.1 | T10.2 50.47,20.31 51.43,19.36 51.43,13.01 50.47,12.05 T9.2 51.43,9.34 51.43,1.57 56.51,1.57 | U2.1 24.54,26.55 | 24.54,26.55 20.31,22.32 20.31,19.99 17.13,16.82 v16.69,16.82 13.96,16.82 C37.- 13.04,17.17 12.97,16.94 12.97,14.57 IC6.1 | 47.62,32.69 v47.62,34.49 47.62,35.87 | v27.29,39.04 30.47,35.87 v30.66,35.87 | 47.62,35.87 45.71,37.77 45.71,40.31 C42.2 | C41.2 31.97,41.58 27.29,41.58 | PAD55.1 47.62,32.69 | 47.62,35.87 48.17,35.31 51.97,35.31 55.15,38.49 58.32,38.49 60.63,36.18 63.49,36.18 | 65.39,40.31 v64.76,40.95 66.03,39.68 66.03,35.87 | 58.41,1.57 65.39,1.57 65.39,4.12 64.12,5.38 62.86,5.38 59.68,8.56 59.68,12.37 66.03,18.72 66.03,35.87 | 58.41,1.57 56.51,1.57 | v58.41,4.12 58.41,1.57 | C48.2 56.51,1.57 | U$2.5 20.97,42.36 20.94,42.39 | C49.2 C50.2 C51.2 63.49,36.18 | 66.03,35.87 65.71,36.18 63.49,36.18 | v27.29,39.04 24.75,39.04 24.27,38.56 R82.2 | D9.C 13.33,41.58 | 24.54,26.55 21.35,29.75 C34.2 C52.2
IO0  (via drill 0.6 pad 1.3)
  Top 0.61: v112.38,7.93 42.36,35.05 U3.25
  Bottom 0.61: R8.2 126.99,9.83 125.72,8.56 118.73,8.56 | 118.73,8.56 116.19,8.56 115.56,7.93 v112.38,7.93 111.11,7.93 110.48,8.56 PAD22.1 | T1.3 118.73,8.56
IO1
  Bottom 0.61: U2.8 34.73,31.88 36.19,33.33 PAD47.1
IO2
  Bottom 0.61: U2.9 36.08,27.93 36.08,31.64 38.73,34.28 PAD45.1
IO3  (via drill 0.6 pad 1.3)
  Top 0.61: R71.2 126.99,33.96 125.72,35.23 118.73,35.23 | 118.73,35.23 116.19,35.23 115.56,35.87 v43.17,7.93 111.11,35.87 110.48,35.23 PAD51.1 | T6.3 118.73,35.23
  Bottom 0.61: v43.17,7.93 42.36,8.74 U2.25
IO4
  Bottom 0.61: U2.11 38.55,29.97 43.8,35.23 PAD46.1
IO5
  Bottom 0.61: U2.31 34.73,8.11 36.19,6.66 PAD58.1
IO6
  Bottom 0.61: U2.30 36.01,8.74 37.46,7.29 37.46,5.38 38.73,4.12 PAD57.1
IO7
  Bottom 0.61: U2.10 37.27,30.61 41.27,34.59 PAD56.1
IO18
  Top 0.61: U3.30 36.01,35.05 37.46,36.5 37.46,38.41 38.73,39.68 PAD28.1
IO19
  Top 0.61: U3.31 34.73,35.69 36.19,37.14 PAD29.1
IO25
  Top 0.61: U3.10 37.27,13.19 41.27,9.2 PAD27.1
IO26
  Top 0.61: U3.11 38.55,13.82 43.8,8.56 PAD17.1
IO32
  Top 0.61: U3.8 34.73,11.91 36.19,10.46 PAD18.1
IO33
  Top 0.61: U3.9 36.08,15.86 36.08,12.15 38.73,9.51 PAD14.1
IR1_LED_ANODE
  Top 0.61: R6.1 PAD8.1
IR1_LED_ANODE1
  Bottom 0.61: R60.1 PAD38.1
IR1_LED_CATHODE
  Top 0.61: PAD7.1 T4.3
IR1_LED_CATHODE1
  Bottom 0.61: PAD37.1 T9.3
IR2_LED_ANODE
  Top 0.61: R4.2 PAD10.1
IR2_LED_ANODE1
  Bottom 0.61: R58.2 PAD31.1
IR2_LED_CATHODE
  Top 0.61: T5.3 PAD9.1
IR2_LED_CATHODE1
  Bottom 0.61: T10.3 PAD39.1
N$1
  Top 0.61: R40.1 13.81,7.14 13.33,6.66 D5.A
N$2
  Bottom 0.61: D4.C R39.1
N$3
  Top 0.61: T5.1 47.45,23.34 46.98,23.8 R7.2
N$4
  Bottom 0.61: D3.C R38.1
N$5
  Bottom 0.61: R11.2 117.77,11.58 T1.1
N$6
  Bottom 0.61: IC2.5 102.01,19.84 R1.2 100.14,19.84 98.72,21.26 95.88,21.26 94.6,19.99 C17.1
N$7
  Bottom 0.61: 97.78,25.86 R12.1 95.8,25.94 C4.1 | IC1.2 97.78,25.86 | D2.P$2 97.93,25.71 97.78,25.86
N$8
  Top 0.61: T4.1 46.98,35.09 R9.2
N$9
  Bottom 0.305: U1.1 100.17,8.41 99.05,7.29 R42.1
N$10
  Bottom 0.61: IC1.3 96.51,30.15 97.14,30.79 102.07,30.79 R19.1 R18.2
N$11
  Bottom 0.61: IC7.6 116.19,23.8 114.92,22.53 R37.2
N$12
  Bottom 0.61: C18.2 108.73,24.99 R17.1 108.57,22.38 108.57,19.99 106.67,18.09 104.77,18.09 | 104.77,18.09 IC2.7 | C8.2 97.78,18.95 97.78,18.72 98.41,18.09 104.77,18.09
N$13
  Bottom 0.61: T3.1 130.96,33.65 R13.2
N$14
  Bottom 0.61: R20.2 105.8,29.13 C18.1 105.88,24.99 R17.2 104.13,22.53 103.49,21.9 IC2.6
N$15
  Bottom 0.61: R23.2 94.12,36.5 95.88,36.5 96.36,36.98 R21.1 96.51,36.98 IC1.6
N$16
  Bottom 0.61: C20.1 91.2,31.42 91.59,31.42 R31.1 94.55,33.33 IC1.5
N$17
  Bottom 0.61: R22.1 R21.2 99.2,38.41 99.05,38.41 97.78,37.14 IC1.7
N$18
  Bottom 0.61: T2.1 121.89,14.45 R2.2
N$19
  Top 0.61: T8.1 130.96,10.14 R36.2
N$20
  Top 0.61: R34.2 117.77,32.21 T6.1
N$21
  Top 0.61: T7.1 121.89,29.35 R48.2
N$24
  Top 0.61: C28.1 100.07,27.21 R49.2 100.8,26.98 102.86,26.98 103.49,27.61 IC10.3
N$25
  Top 0.61: 120,21.11 119.45,21.11 C29.1 119.14,21.26 118.1,21.26 114.92,24.44 109.84,24.44 107.3,26.98 105.4,26.98 104.77,27.61 IC10.2 | 120,21.11 R50.2 | IC4.3 120,21.11
N$26
  Top 0.61: IC4.13 118.73,10.19 117.11,8.56 114.92,8.56 R52.2
N$27
  Top 0.61: IC4.14 120,9.81 117.46,7.27 R53.2
N$28
  Top 0.61: IC4.15 121.27,9.2 120,7.93 R54.2
N$29
  Bottom 0.61: C8.1 100.07,16.59 R24.2 100.8,16.82 102.86,16.82 103.49,16.18 IC2.3
N$30
  Top 0.61: IC4.12 117.46,10.46 116.83,9.83 114.29,9.83 112.38,7.93 R56.2
N$31
  Top 0.61: IC4.6 116.19,19.99 114.92,21.26 R63.2
N$32
  Bottom 0.61: R66.1 13.81,36.65 13.33,37.14 D9.A
N$33
  Top 0.305: U4.1 100.17,35.38 99.05,36.5 R68.1
N$34
  Bottom 0.61: T9.1 46.98,8.71 R62.2
N$35
  Bottom 0.61: T10.1 47.45,20.46 46.98,19.99 R61.2
N$36
  Top 0.61: 97.78,17.93 R72.1 95.8,17.86 C33.1 | IC9.2 97.78,17.93 | D10.P$2 97.93,18.09 97.78,17.93
N$37
  Top 0.61: IC9.3 96.51,13.64 97.14,13.01 102.07,13.01 R74.1 R73.2
N$38
  Top 0.61: D8.C R65.1
N$39
  Bottom 0.61: 120,22.68 119.45,22.68 C9.1 119.14,22.53 118.1,22.53 114.92,19.36 109.84,19.36 107.3,16.82 105.4,16.82 104.77,16.18 IC2.2 | 120,22.68 R25.2 | IC7.3 120,22.68
N$40
  Bottom 0.61: IC7.13 118.73,33.6 117.11,35.23 114.92,35.23 R27.2
N$41
  Bottom 0.61: IC7.14 120,33.98 117.46,36.52 R28.2
N$42
  Bottom 0.61: IC7.15 121.27,34.59 120,35.87 R29.2
N$43
  Bottom 0.61: IC7.12 117.46,33.33 116.83,33.96 114.29,33.96 112.38,35.87 R30.2
N$44
  Top 0.61: D7.C R64.1
N$45
  Top 0.61: IC10.5 102.01,23.95 R75.2 100.14,23.95 98.72,22.53 95.88,22.53 94.6,23.8 C43.1
N$46
  Top 0.61: C44.2 108.73,18.8 R76.1 108.57,21.41 108.57,23.8 106.67,25.71 104.77,25.71 | 104.77,25.71 IC10.7 | C28.2 97.78,24.84 97.78,25.07 98.41,25.71 104.77,25.71
N$47
  Top 0.61: R77.2 105.8,14.66 C44.1 105.88,18.8 R76.2 104.13,21.26 103.49,21.9 IC10.6
N$48
  Top 0.61: R80.2 94.12,7.29 95.88,7.29 96.36,6.81 R78.1 96.51,6.81 IC9.6
N$49
  Top 0.61: C46.1 91.2,12.37 91.59,12.37 93.49,10.47 R81.1 94.55,10.46 IC9.5
N$50
  Top 0.61: R79.1 R78.2 99.2,5.38 99.05,5.38 97.78,6.66 IC9.7
PHOTODIODE_ADC  (via drill 0.6 pad 1.3)
  Top 0.61: v93.33,28.25 61.59,14.91 v100.32,28.88
  Bottom 0.305: U1.5 99.32,11.46 99.05,11.73 98.41,11.73
  Bottom 0.61: C4.2 94.03,22.95 | 94.03,22.95 96.43,22.94 R12.2 | C20.2 93.56,28.48 v93.33,28.25 92.06,28.25 92.06,23.17 | 92.06,23.17 92.28,22.95 94.03,22.95 | v100.32,28.88 100.26,28.82 IC1.1 | 92.06,23.17 92.06,18.72 93.77,17.02 94.17,17.02 C17.2 | C17.2 94.83,16.59 95.24,16.18 C17.2 | 98.41,11.73 97.78,11.73 97.46,12.05 97.46,13.32 94.6,16.18 C17.2
PHOTODIODE_ADC1  (via drill 0.6 pad 1.3)
  Top 0.305: U4.5 99.32,32.33 99.05,32.05 98.41,32.05
  Top 0.61: C33.2 94.03,20.84 | 94.03,20.84 96.43,20.86 R72.2 | C46.2 93.56,15.31 v62.22,28.25 92.06,15.54 92.06,20.62 | 92.06,20.62 92.28,20.84 94.03,20.84 | v55.23,28.88 100.26,14.97 IC9.1 | 92.06,20.62 92.06,25.07 93.77,26.77 94.17,26.77 C43.2 | C43.2 94.83,27.21 95.24,27.61 C43.2 | 98.41,32.05 97.78,32.05 97.46,31.74 97.46,30.47 94.6,27.61 C43.2
  Bottom 0.61: v62.22,28.25 61.59,28.88 v55.23,28.88
PPG_SIGNAL_1_ADC
  Bottom 0.305: U1.7 104.27,11.22
  Bottom 0.61: R25.1 122.47,19.76 C9.2 117.87,19.76 116.19,18.09 110.89,18.09 106.56,13.75 | 104.27,11.22 U1.6 106.56,13.75 | IC2.1 106.56,14.32 106.56,13.75
PPG_SIGNAL_1_ADC1
  Top 0.305: U4.7 104.27,32.57
  Top 0.61: R50.1 122.47,24.03 C29.2 117.87,24.03 116.19,25.71 110.89,25.71 106.56,30.04 | 104.27,32.57 U4.6 106.56,30.04 | IC10.1 106.56,29.47 106.56,30.04
PPG_SIGNAL_2_ADC
  Bottom 0.305: U1.4 99.38,10.96 99.13,10.71 98.41,10.71
  Bottom 0.61: C19.2 93.56,41.58 | 93.56,41.58 93.56,42.47 93.23,42.8 88.94,42.8 88.94,19.3 95.8,12.45 95.8,11.81 96.89,10.71 98.41,10.71 | R22.2 93.56,41.58
PPG_SIGNAL_2_ADC1
  Top 0.305: U4.4 99.38,32.83 99.13,33.08 98.41,33.08
  Top 0.61: C45.2 93.56,2.21 | 93.56,2.21 93.56,1.32 93.23,0.99 88.94,0.99 88.94,24.49 95.8,31.34 95.8,31.98 96.89,33.08 98.41,33.08 | R79.2 93.56,2.21
PPG_SIGNAL_GAIN_A  (via drill 0.6 pad 1.3)
  Top 0.61: v110.48,30.11 41.86,13.68 41.09,14.46 U3.13
  Bottom 0.61: IC7.11 116.19,28.88 111.92,28.88 110.69,30.11 v110.48,30.11
PPG_SIGNAL_GAIN_A1  (via drill 0.6 pad 1.3)
  Top 0.61: IC4.11 116.19,14.91 111.92,14.91 110.69,13.68 v45.08,30.11
  Bottom 0.61: v45.08,30.11 41.86,30.11 41.09,29.34 U2.13
PPG_SIGNAL_GAIN_B  (via drill 0.6 pad 1.3)
  Top 0.61: U3.12 39.82,14.28 42.99,11.1 v110.48,32.69
  Bottom 0.61: IC7.10 114.8,31.83 114.8,30.6 114.83,30 113.02,30 110.48,32.54 v110.48,32.69
PPG_SIGNAL_GAIN_B1  (via drill 0.6 pad 1.3)
  Top 0.61: IC4.10 114.8,11.96 114.8,13.19 114.83,13.79 113.02,13.79 110.48,11.25 v45.08,32.69
  Bottom 0.61: U2.12 39.82,29.52 42.99,32.69 v45.08,32.69
R_PROG
  Bottom 0.61: IC5.2 141.59,39.19 R3.2
R_PROG1
  Top 0.61: IC3.2 141.59,4.6 R55.2
RTS
  Bottom 0.61: T2.2 117.77,14.43 R11.1 113.5,14.43 113.02,13.94 PAD15.1
RTS1
  Top 0.61: T7.2 117.77,29.36 R34.1 113.5,29.36 113.02,29.85 PAD43.1
SCL  (via drill 0.6 pad 1.3)
  Top 0.61: PAD3.1 26.33,40.54 26.02,40.23 26.02,38.41 v128.26,6.66 28.38,36.05 U3.36
  Bottom 0.305: U1.10 104.97,8.77 | 106.56,7.18 108.39,5.34
  Bottom 0.61: R43.1 131.44,9.85 130.52,8.94 130.52,8.92 v128.26,6.66 128.26,6.02 126.99,4.75 108.99,4.75 106.56,7.18 104.97,8.77
SCL1  (via drill 0.6 pad 1.3)
  Top 0.305: U4.10 104.97,35.02 | 106.56,36.61 108.39,38.45
  Top 0.61: R69.1 131.44,33.94 130.52,34.85 130.52,34.87 v27.29,6.66 128.26,37.77 126.99,39.04 108.99,39.04 106.56,36.61 104.97,35.02
  Bottom 0.61: PAD33.1 26.33,3.25 26.02,3.56 26.02,5.38 v27.29,6.66 28.38,7.74 U2.36
SDA  (via drill 0.6 pad 1.3)
  Top 0.61: U3.33 32.2,35.23 33.65,36.68 33.65,37.14 | 33.65,37.14 PAD4.1 | v122.55,6.46 33.2,37.14 33.65,37.14
  Bottom 0.305: U1.9 105.4,9.96
  Bottom 0.61: v122.55,6.46 122.55,6.66 | v122.55,6.46 125.53,6.46 128.9,9.83 R44.1 | v122.55,6.46 109.54,6.46 106.03,9.96 105.4,9.96
SDA1  (via drill 0.6 pad 1.3)
  Top 0.305: U4.9 105.4,33.83
  Top 0.61: v33.01,6.46 122.55,37.14 | v33.01,6.46 125.53,37.33 128.9,33.96 R70.1 | v33.01,6.46 109.54,37.33 106.03,33.83 105.4,33.83
  Bottom 0.61: U2.33 32.2,8.56 33.65,7.11 33.65,6.66 | 33.65,6.66 PAD34.1 | v33.01,6.46 33.2,6.66 33.65,6.66
V_BATT  (via drill 0.6 pad 1.3)
  Top 0.61: PAD1.1 6.34,11.1 v149.22,28.88 5.71,15.54 5.71,19.95 Q5.3
  Bottom 0.61: R16.2 148.43,29.67 v149.22,28.88 | IC5.5 144.34,31.42 R16.2 | C14.1 148.35,31.5 R16.2
V_BATT1  (via drill 0.6 pad 1.3)
  Top 0.61: R47.2 148.43,14.12 v6.34,28.88 | IC3.5 144.34,12.37 R47.2 | C39.1 148.35,12.29 R47.2
  Bottom 0.61: PAD30.1 6.34,32.69 v6.34,28.88 5.71,28.25 5.71,23.84 Q1.3
V_BATT_ADC  (via drill 0.6 pad 1.3)
  Top 0.61: U3.7 33.47,10.46 34.28,9.65 34.28,3.88 C16.1 34.69,1.57 v120.64,42.45
  Bottom 0.61: R16.1 152.39,31.42 153.66,32.69 153.66,39.68 152.39,40.95 R15.2 151.27,40.95 151.12,41.1 151.12,42.8 120.64,42.8 v120.64,42.45
V_BATT_ADC1  (via drill 0.6 pad 1.3)
  Top 0.61: R47.1 152.39,12.37 153.66,11.1 153.66,4.12 152.39,2.84 R46.2 151.27,2.84 151.12,2.69 151.12,0.99 120.64,0.99 v34.91,42.45
  Bottom 0.61: U2.7 33.47,33.33 34.28,34.14 34.28,39.91 C42.1 34.69,42.22 v34.91,42.45
V_USB  (via drill 0.6 pad 1.3)
  Top 0.61: 15.22,17.71 D1.A 15.87,18.09 | 15.22,17.71 Q5.1 | 15.87,18.09 v139.69,27.61 15.87,14.16 11.54,9.83 | 15.22,17.71 15.49,17.71 15.87,18.09 | v153.66,29.52 1.32,13.7 1.32,8.5 1.9,7.93 8.88,7.93 v146.04,35.23 10.79,9.83 11.54,9.83 | U$1.1 18.38,6.66 17.74,7.29 R40.2 16.5,7.44 16.5,9.2 15.87,9.83 11.54,9.83 | PAD25.1 v146.04,5.38
  Bottom 0.61: R14.1 R35.2 | R14.1 R10.2 134.69,23.95 C2.1 C3.1 | v139.69,27.61 139.54,27.46 R14.1 | v153.66,29.52 153.66,19.36 | 153.66,19.36 153.66,13.64 146.04,6.02 v146.04,5.38 | C7.1 146.04,37.77 | 146.04,37.77 145.2,37.77 IC5.4 | v146.04,35.23 146.04,37.77 | 153.66,19.36 150.08,19.36 D4.A D3.A
V_USB1  (via drill 0.6 pad 1.3)
  Top 0.61: R45.1 R57.2 | R45.1 R33.2 134.69,19.84 C27.1 C31.1 | v15.87,27.61 139.54,16.33 R45.1 | v1.9,29.52 153.66,24.44 | 153.66,24.44 153.66,30.15 146.04,37.77 v9.52,5.38 | C38.1 146.04,6.02 | 146.04,6.02 145.2,6.02 IC3.4 | v9.52,35.23 146.04,6.02 | 153.66,24.44 150.08,24.44 D8.A D7.A
  Bottom 0.61: 15.22,26.08 D6.A 15.87,25.71 | 15.22,26.08 Q1.1 | 15.87,25.71 v15.87,27.61 15.87,29.63 11.54,33.96 | 15.22,26.08 15.49,26.08 15.87,25.71 | v1.9,29.52 1.32,30.09 1.32,35.29 1.9,35.87 8.88,35.87 v9.52,35.23 10.79,33.96 11.54,33.96 | U$2.1 18.38,37.14 17.74,36.5 R66.2 16.5,36.35 16.5,34.59 15.87,33.96 11.54,33.96 | PAD54.1 v9.52,5.38
V_USB_ADC  (via drill 0.6 pad 1.3)
  Top 0.61: U3.6 32.2,6.02 | C15.1 32.43,6.25 32.2,6.02 | 32.2,6.02 30.29,4.12 v126.35,39.68
  Bottom 0.61: R35.1 R26.2 130.65,30.3 126.35,34.59 v126.35,39.68
V_USB_ADC1  (via drill 0.6 pad 1.3)
  Top 0.61: R57.1 R51.2 130.65,13.49 126.35,9.2 v29.2,39.68
  Bottom 0.61: U2.6 32.2,37.77 | C41.1 32.43,37.54 32.2,37.77 | 32.2,37.77 30.29,39.68 v29.2,39.68
VIN
  Top 0.61: IC8.2 12.67,35.87 C1.1 15.42,36.08 15.42,39.7 PAD20.1
VIN1
  Bottom 0.61: IC6.2 12.67,7.93 C30.1 15.42,7.71 15.42,4.09 PAD49.1
VIN_SW  (via drill 0.6 pad 1.3)
  Top 0.61: 12.95,22.27 Q5.2 | D1.C 15.22,22.27 Q5.2 | Q5.2 12.31,22.27 10.79,23.8 4.44,23.8 3.8,24.44 v151.75,17.45 | PAD19.1 v142.87,6.02
  Bottom 0.61: v151.75,17.45 151.75,14.91 v142.87,6.02
VIN_SW1  (via drill 0.6 pad 1.3)
  Top 0.61: v3.8,17.45 151.75,28.88 v12.69,6.02
  Bottom 0.61: 12.95,21.52 Q1.2 | D6.C 15.22,21.52 Q1.2 | Q1.2 12.31,21.52 10.79,19.99 4.44,19.99 3.8,19.36 v3.8,17.45 | PAD48.1 v12.69,6.02
(copper drawn outside any net)
  shapes: Bottom circle x12, Top area x4, Top circle x12

## Text on the board
Top: NIRGM / V7
Bottom: NIRGM / V7